# Altium PCB LPF-SWR.PcbDoc
Units mm, origin at the board's own origin, x right, y up, seen from the top; angles counter-clockwise.
Board outline 100 x 100 mm, 2 copper layers (Top Layer, Bottom Layer); 107 components, 77 nets, 382 pads, 0 vias.
Unrouted connection lines stored in the file: 303.
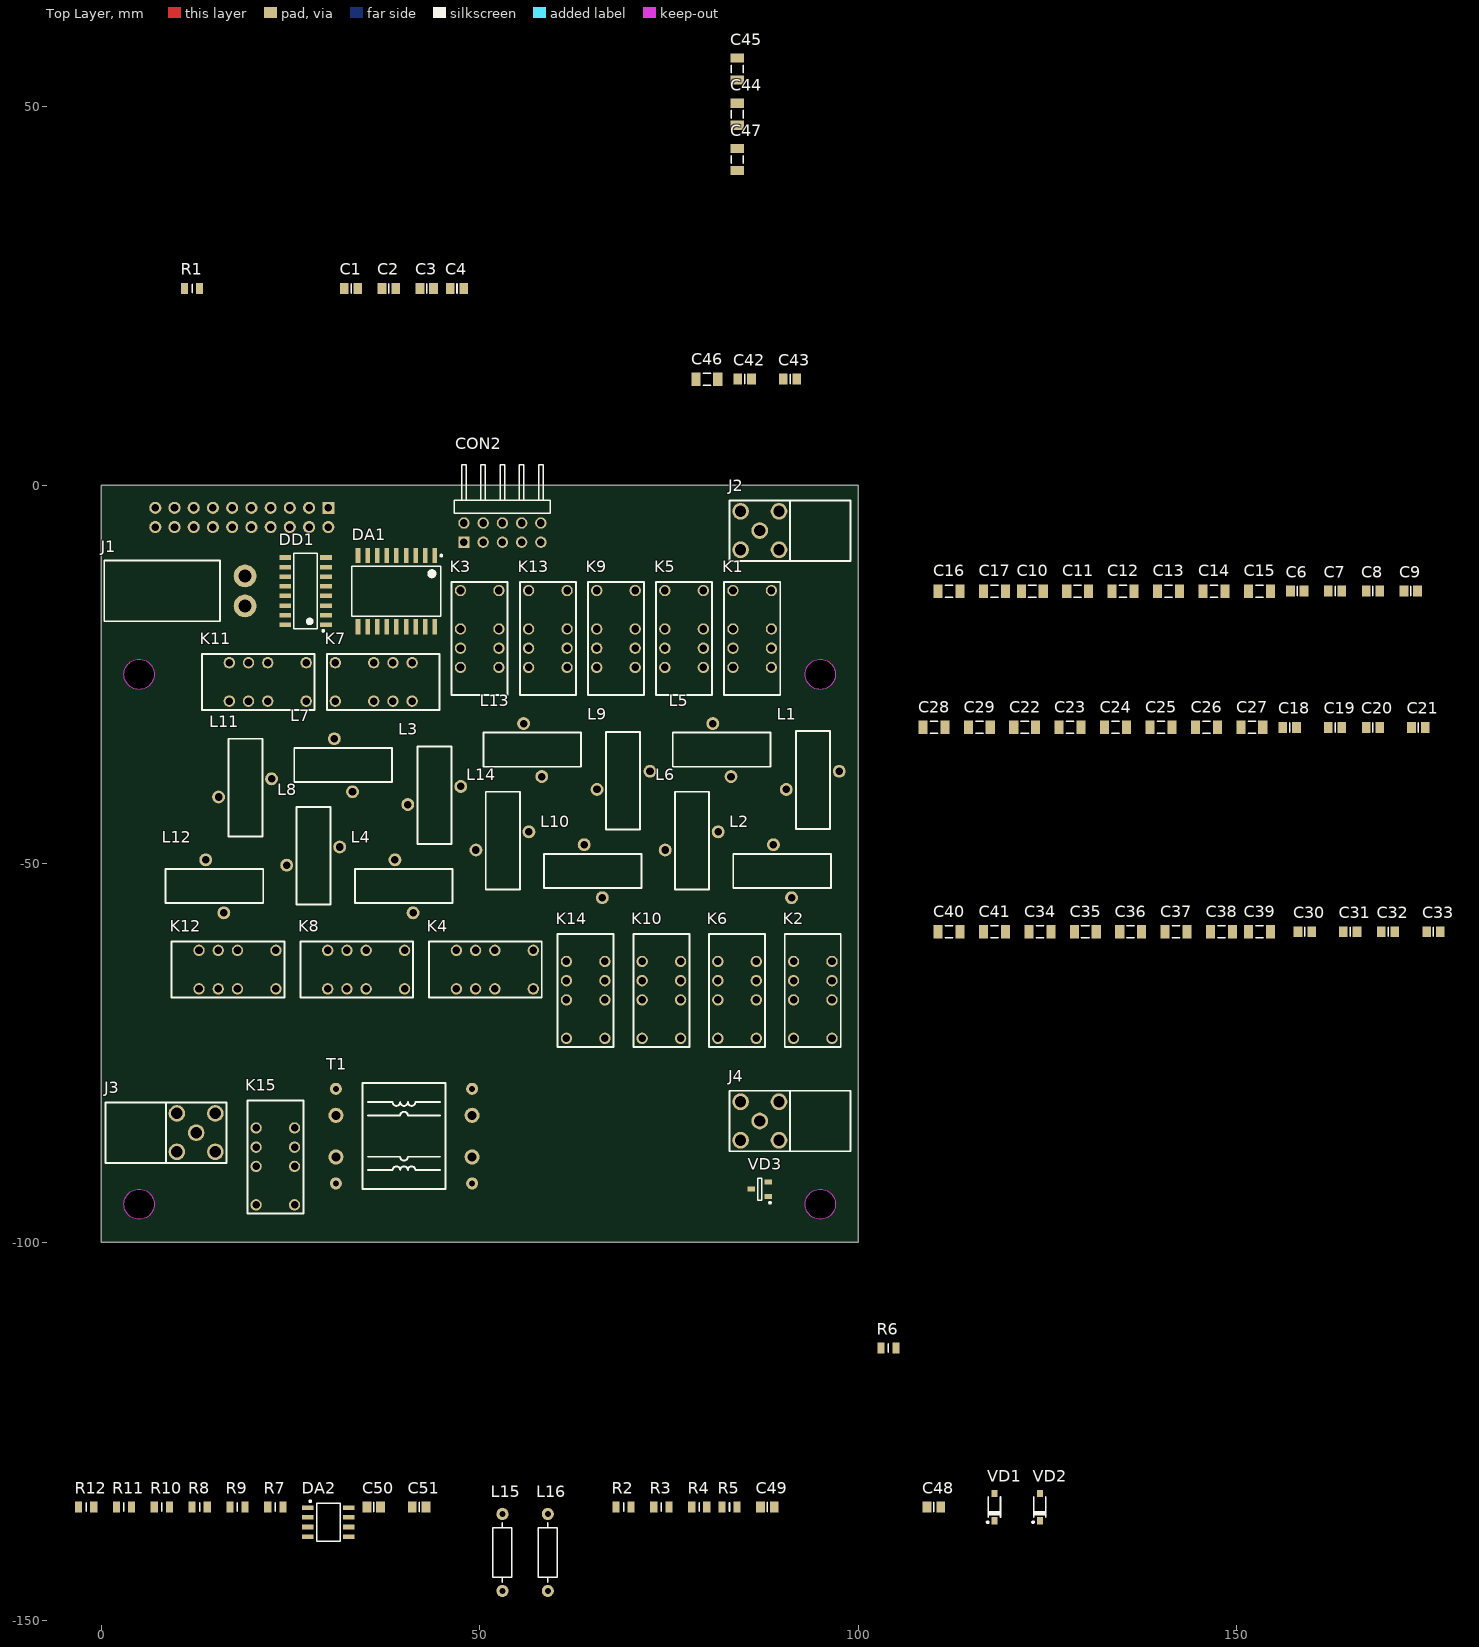
[diagram p0: Top Layer view]
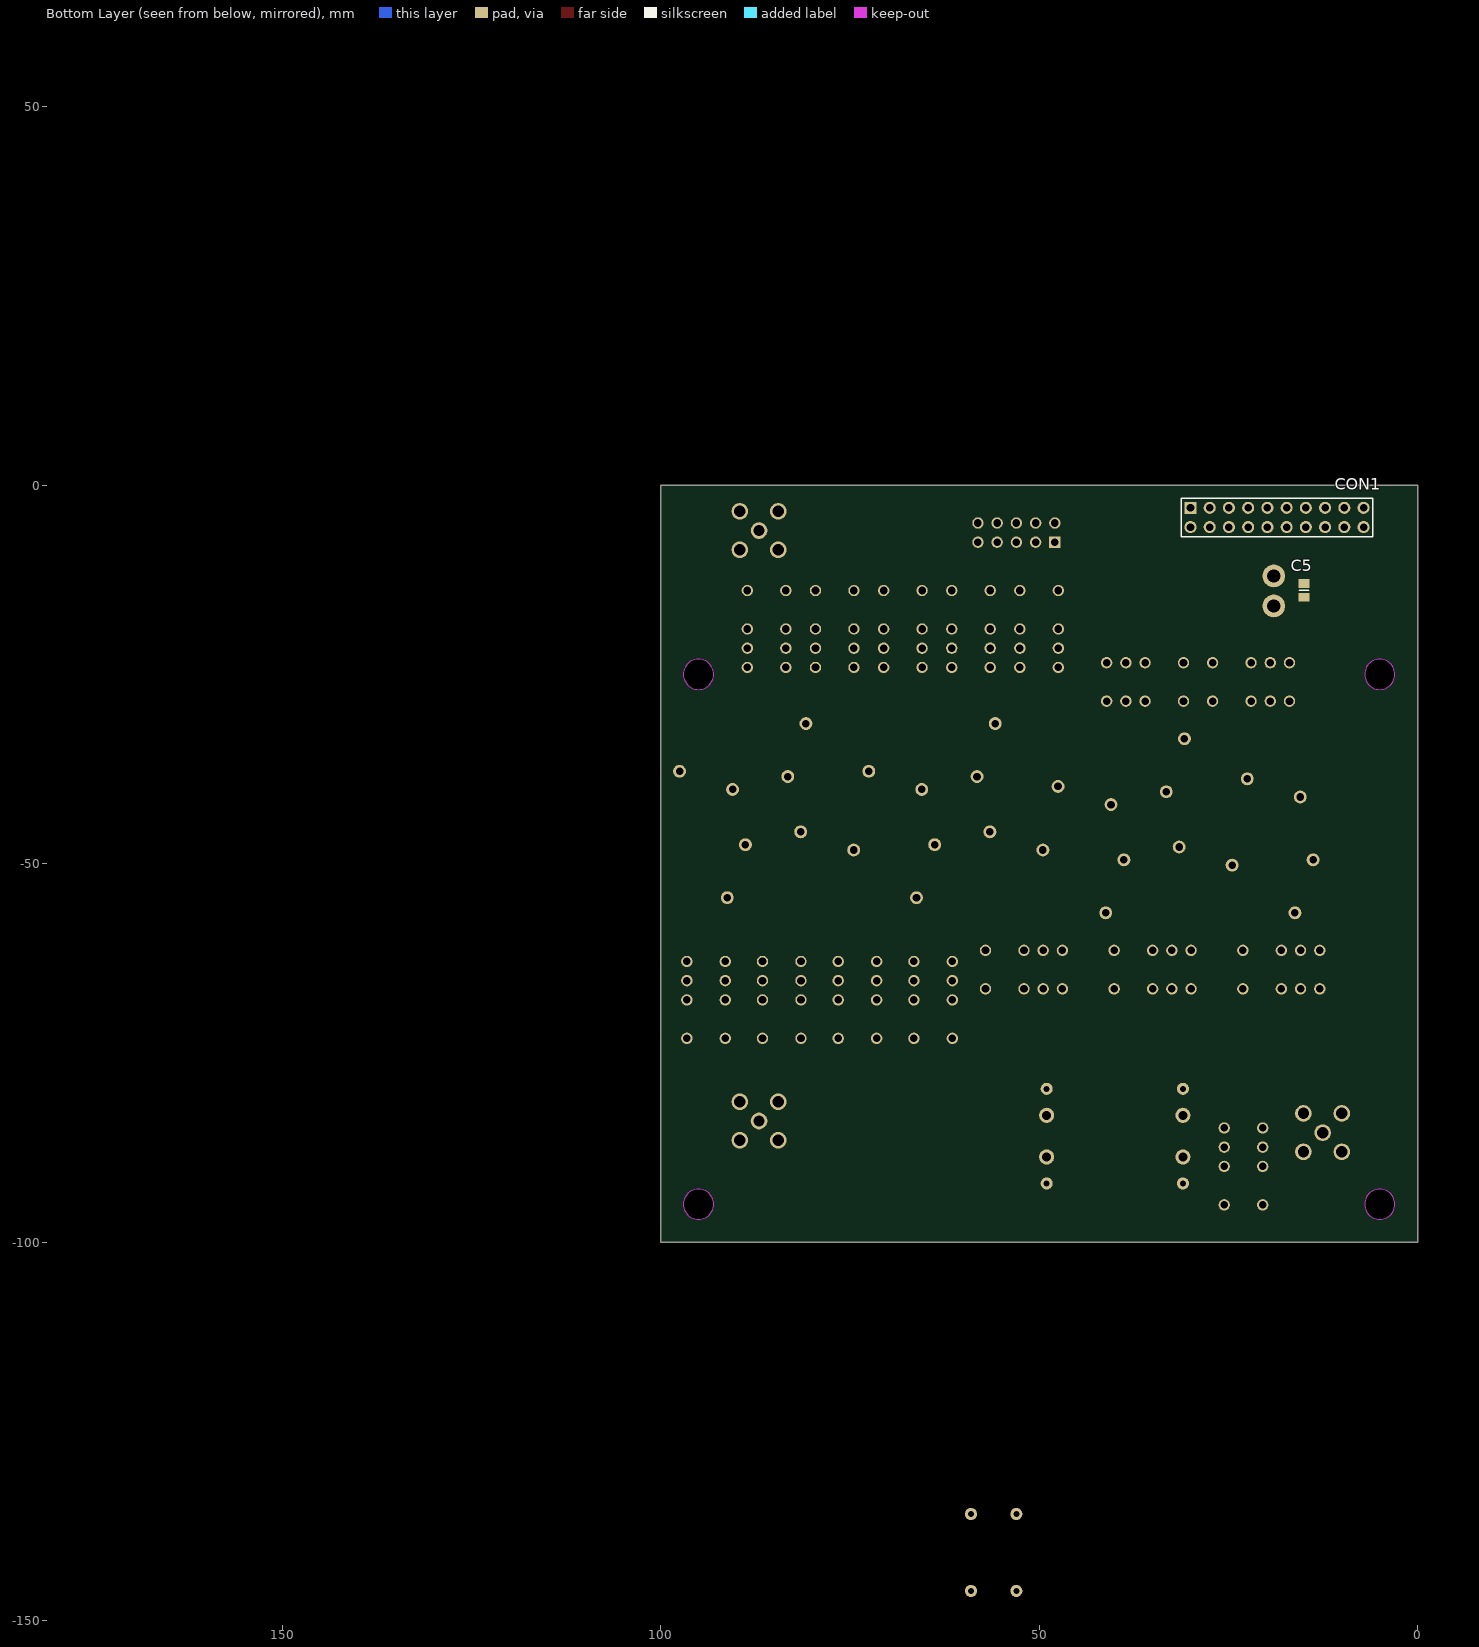
[diagram p1: Bottom Layer view, seen from below]

## Layer stack, top to bottom
Top Solder: solder mask 0.0102, Solder Resist, Dk 3.5
Top Layer: signal copper 0.0356
Dielectric 1: dielectric 0.32, FR-4, Dk 4.8
Bottom Layer: signal copper 0.0356
Bottom Solder: solder mask 0.0102, Solder Resist, Dk 3.5

## Board outline
0,0 0,-100 100,-100 100,0
cut-out: 5,-97 cw(c5,-95) 3,-95 cw(c5,-95) 5,-93 cw(c5,-95) 7,-95 cw(c5,-95)
cut-out: 5,-27 cw(c5,-25) 3,-25 cw(c5,-25) 5,-23 cw(c5,-25) 7,-25 cw(c5,-25)
cut-out: 95,-27 cw(c95,-25) 93,-25 cw(c95,-25) 95,-23 cw(c95,-25) 97,-25 cw(c95,-25)
cut-out: 95,-97 cw(c95,-95) 93,-95 cw(c95,-95) 95,-93 cw(c95,-95) 97,-95 cw(c95,-95)

## Design rules (kind name [scope] priority, off if disabled: settings)
Clearance [All] p1: gap=0.254 ignorepadtopadclearanceinfootprint=FALSE except(0: Arc-Hole Track-Hole SMDPad-Hole THPad-Hole Via-Hole Fill-Hole Poly-Hole Region-Hole Text-Hole)
PolygonConnect [All] p1: connectstyle=Relief reliefconductorwidth=0.254 reliefentries=4 polygonreliefangle="90 Angle" airgapwidth=0.254
RoutingVias [All] p1: holewidth=0.711 width=1.27 viastyle="Through Hole" minholewidth=0.711 minwidth=1.27 maxholewidth=0.711 maxwidth=1.27
SolderMaskExpansion [All] p1: expansion=0.102 istentingtop=FALSE
Width [All] p1: maxlimit=0.254 minlimit=0.254 preferedwidth=0.254
30 further rules are at their usual default settings.

## Classes and differential pairs
net class HF_LPF[0..6]: HF_LPF0 HF_LPF1 HF_LPF2 HF_LPF3 HF_LPF4 HF_LPF5 HF_LPF6
component class swr-antenna: C48 C49 C50 C51 DA2 J3 J4 K15 L15 L16 R2 R3 R4 R5 R6 R7 R8 R9 R10 R11 R12 T1 VD1 VD2 VD3
component class LPF: C6 C7 C8 C9 C10 C11 C12 C13 C14 C15 C16 C17 C18 C19 C20 C21 C22 C23 C24 C25 C26 C27 C28 C29 C30 C31 C32 C33 C34 C35 C36 C37 C38 C39 C40 C41 C42 C43 C44 C45 C46 C47 J2 K1 K2 K3 K4 K5 K6 K7 K8 K9 K10 K11 K12 K13 K14 L1 L2 L3 L4 L5 L6 L7 L8 L9 L10 L11 L12 L13 L14
component class control-interface: C1 C2 C3 C4 C5 CON1 CON2 DA1 DD1 J1 R1

## Components (designator, comment, footprint, x,y, rotation, side; value= is the part's Value field where it differs from the comment)
C1 "2.2uF" CAPC2013X100N 33.001,26 r0 top
C2 "0.1uF" CAPC2013X100N 38.001,26 r0 top
C3 "0.1uF" CAPC2013X100N 43.001,26 r0 top
C4 "2.2uF" CAPC2013X100N 47.001,26 r0 top
C5 "10uF" CAPC2013X100N 15,-13.9 r90 bottom
C6 "0.1uF" CAPC2013X100N 158.001,-14 r0 top
C7 "0.1uF" CAPC2013X100N 163.001,-14 r0 top
C8 "0.1uF" CAPC2013X100N 168.001,-14 r0 top
C9 "0.1uF" CAPC2013X100N 173.001,-14 r0 top
C10 "1271" CAPC3216X125N 123.001,-14 r0 top
C11 "1100" CAPC3216X125N 129.001,-14 r0 top
C12 "1228" CAPC3216X125N 135.001,-14 r0 top
C13 "171.8" CAPC3216X125N 141.001,-14 r0 top
C14 "220" CAPC3216X125N 147.001,-14 r0 top
C15 "94.6" CAPC3216X125N 153.001,-14 r0 top
C16 "1271" CAPC3216X125N 112.001,-14 r0 top
C17 "171.8" CAPC3216X125N 118.001,-14 r0 top
C18 "0.1uF" CAPC2013X100N 157.001,-32 r0 top
C19 "0.1uF" CAPC2013X100N 163.001,-32 r0 top
C20 "0.1uF" CAPC2013X100N 168.001,-32 r0 top
C21 "0.1uF" CAPC2013X100N 174.001,-32 r0 top
C22 "756.7" CAPC3216X125N 122.001,-32 r0 top
C23 "1000" CAPC3216X125N 128.001,-32 r0 top
C24 "386" CAPC3216X125N 134.001,-32 r0 top
C25 "106" CAPC3216X125N 140.001,-32 r0 top
C26 "180" CAPC3216X125N 146.001,-32 r0 top
C27 "8.5" CAPC3216X125N 152.001,-32 r0 top
C28 "756.7" CAPC3216X125N 110.001,-32 r0 top
C29 "106" CAPC3216X125N 116.001,-32 r0 top
C30 "0.1uF" CAPC2013X100N 159.001,-59 r0 top
C31 "0.1uF" CAPC2013X100N 165.001,-59 r0 top
C32 "0.1uF" CAPC2013X100N 170.001,-59 r0 top
C33 "0.1uF" CAPC2013X100N 176.001,-59 r0 top
C34 "464.8" CAPC3216X125N 124.001,-59 r0 top
C35 "470" CAPC3216X125N 130.001,-59 r0 top
C36 "356.4" CAPC3216X125N 136.001,-59 r0 top
C37 "61.69" CAPC3216X125N 142.001,-59 r0 top
C38 "100" CAPC3216X125N 148.001,-59 r0 top
C39 "9.7" CAPC3216X125N 153.001,-59 r0 top
C40 "464.8" CAPC3216X125N 112.001,-59 r0 top
C41 "61.69" CAPC3216X125N 118.001,-59 r0 top
C42 "0.1uF" CAPC2013X100N 85.001,14 r0 top
C43 "0.1uF" CAPC2013X100N 91.001,14 r0 top
C44 "288.9" CAPC3216X125N 84,49.001 r90 top
C45 "330" CAPC3216X125N 84,55.001 r90 top
C46 "199.1" CAPC3216X125N 80.001,14 r0 top
C47 "288.9" CAPC3216X125N 84,43.001 r90 top
C48 "0.1uF" CAPC2013X100N 110.001,-134.999 r0 top
C49 "10uF" CAPC2013X100N 88.001,-134.999 r0 top
C50 "0.1uF" CAPC2013X100N 36.001,-134.999 r0 top
C51 "0.1uF" CAPC2013X100N 42.001,-134.999 r0 top
CON1 "PBD-20" PBD-20 18.57,-4.27 r180 bottom locked
CON2 "PLD-10" PLD-10R 53,-6.27 r0 top
DA1 "ULN2803C" SOIC127P1030X265-18N 39,-14 r270 top
DA2 "LM358" SOIC127P600X175-8N 30.001,-136.999 r0 top
DD1 "74HCT595D" SOIC127P600X175-16N 27,-14 r180 top
J1 "PWL-2" PWL-2R 19,-13.98 r90 top
J2 "SMA" SMA002 87,-6 r270 top
J3 "SMA" SMA002 12.54,-85.54 r90 top
J4 "SMA" SMA002 87,-84 r270 top
K1 "G6S-2-12VDC" G6S-2 86,-19 r0 top
K2 "G6S-2-12VDC" G6S-2 94,-68 r180 top
K3 "G6S-2-12VDC" G6S-2 50,-19 r0 top
K4 "G6S-2-12VDC" G6S-2 52,-64 r270 top
K5 "G6S-2-12VDC" G6S-2 77,-19 r0 top
K6 "G6S-2-12VDC" G6S-2 84,-68 r180 top
K7 "G6S-2-12VDC" G6S-2 36,-26 r90 top
K8 "G6S-2-12VDC" G6S-2 35,-64 r270 top
K9 "G6S-2-12VDC" G6S-2 68,-19 r0 top
K10 "G6S-2-12VDC" G6S-2 74,-68 r180 top
K11 "G6S-2-12VDC" G6S-2 22,-26 r270 top
K12 "G6S-2-12VDC" G6S-2 18,-64 r270 top
K13 "G6S-2-12VDC" G6S-2 59,-19 r0 top
K14 "G6S-2-12VDC" G6S-2 64,-68 r180 top
K15 "G6S-2-12VDC" G6S-2 23,-90 r180 top
L1 "4.375u" T50-2 94,-39 r270 top
L2 "4.375u" T50-2 90,-51 r0 top
L3 "591.3nH" T50-6 44,-41 r270 top
L4 "591.3nH" T50-6 40,-53 r0 top
L5 "2.604uH" T50-2 82,-35 r0 top
L6 "2.604uH" T50-2 78,-47 r270 top
L7 "342.2nH" T50-6 32,-37 r0 top
L8 "342.2nH" T50-6 28,-49 r270 top
L9 "1.5uH" T50-6 69,-39 r90 top
L10 "1.5uH" T50-6 65,-51 r0 top
L11 "199.1nH" T50-6 19,-40 r270 top
L12 "199.1nH" T50-6 15,-53 r0 top
L13 "994.9nH" T50-6 57,-35 r0 top
L14 "994.9nH" T50-6 53,-47 r270 top
L15 "100uH" RES1016-650X250 53.001,-140.999 r90 top
L16 "100uH" RES1016-650X250 59.001,-140.999 r90 top
R1 "10k" RESC2013X64N 12.001,26 r0 top
R2 "2.2k" RESC2013X64N 69.001,-134.999 r0 top
R3 "50" RESC2013X64N 74.001,-134.999 r0 top
R4 "50" RESC2013X64N 79.001,-134.999 r0 top
R5 "2.2k" RESC2013X64N 83.001,-134.999 r0 top
R6 "100" RESC2013X64N 104.001,-114 r0 top
R7 "100" RESC2013X64N 23.001,-134.999 r0 top
R8 "22k" RESC2013X64N 13.001,-134.999 r0 top
R9 "22k" RESC2013X64N 18.001,-134.999 r0 top
R10 "*" RESC2013X64N 8.001,-134.999 r0 top
R11 "100" RESC2013X64N 3.001,-134.999 r0 top
R12 "*" RESC2013X64N -1.999,-134.999 r0 top
T1 "BN43-302" TANDEM 40,-86 r180 top
VD1 "BAT46ZFILM" SOD3816X118N 118.001,-134.999 r90 top
VD2 "BAT46ZFILM" SOD3816X118N 124.001,-134.999 r90 top
VD3 "BAT54SL" SOT95P229X119-3N 87,-93 r180 top

## Footprints (in the part's own frame and the unit in brackets; to place one, negate y for a bottom-side part, rotate by r counter-clockwise, add the part's x,y. Pads: shape width x height; smd on the part's side, far side on the other; paste and mask are expansions set on the pad)
CAPC2013X100N [mm] "Capacitor, Non-Polarized, Chip; 2.00mm L X 1.25mm W X 0.9mm H, IPC Medium Density"
  rect 1.15x1.45 smd: 1(-0.9,0) 2(0.9,0)
  silkscreen extent 0,-0.63 0,0.63, body extent -1.1,-0.72 1.1,0.73, height 1
CAPC3216X125N [mm] "Capacitor, Non-Polarized, Chip; 3.20mm L X 1.60mm W X 1.25mm H, IPC Medium Density"
  rect 1.2x1.8 smd: 1(-1.45,0) 2(1.45,0)
  silkscreen extent -0.5,-0.8 0.5,0.8, body extent -1.7,-0.9 1.7,0.9, height 1.25
G6S-2 [mm] "Compact, Industry-Standard 2-pole relay,  designed to switch 2A Signal Loads"
  round 1.5 hole 1: 1(-2.54,5.08) 3(-2.54,0) 4(-2.54,-2.54) 5(-2.54,-5.08) 8(2.54,-5.08) 9(2.54,-2.54) 10(2.54,0) 12(2.54,5.08)
  silkscreen extent -3.7,-8.7 3.7,6.2, body extent -3.65,-8.65 3.65,6.15, height 9.2
PBD-20 [mm] "20 Contacts - Pitch 2.54mm - Top Entry, Dual Row Through Mount Receptacle"
  rect 1.6x1.6 hole 1: 1(-11.43,1.27)
  round 1.6 hole 1: 2(-11.43,-1.27) 3(-8.89,1.27) 4(-8.89,-1.27) 5(-6.35,1.27) 6(-6.35,-1.27) 7(-3.81,1.27) 8(-3.81,-1.27) 9(-1.27,1.27) 10(-1.27,-1.27) 11(1.27,1.27) 12(1.27,-1.27) 13(3.81,1.27) 14(3.81,-1.27) 15(6.35,1.27) 16(6.35,-1.27) 17(8.89,1.27) 18(8.89,-1.27) 19(11.43,1.27) 20(11.43,-1.27)
  silkscreen extent -12.66,-2.54 12.66,2.54, body extent -12.7,-2.54 12.7,2.54, height 8.5
PLD-10R [mm] "10 Contacts - Pitch 2.54mm - Dual Row Right Angle Strip Header - Insulator 1.7mm"
  rect 1.5x1.5 hole 1: 1(-5.08,-1.27)
  round 1.5 hole 1: 2(-5.08,1.27) 3(-2.54,-1.27) 4(-2.54,1.27) 5(0,-1.27) 6(0,1.27) 7(2.54,-1.27) 8(2.54,1.27) 9(5.08,-1.27) 10(5.08,1.27)
  silkscreen extent -6.35,2.57 6.35,8.97, body extent -6.35,-1.57 6.35,10.27, height 5.57
PWL-2R [mm] "PCB Connector; Rated Voltage: 50/250V AC.DC; Rated Current: 5A"
  round 3 hole 1.75: 1(-1.98,0) 2(1.98,0)
  silkscreen extent -4,3.3 4,18.6, body extent -3.96,-0.6 3.96,18.97, height 9.6
RES1016-650X250 [mm] "Resistor, Axial, Pad spacing 10.16 mm - Body Lengh 6.5mm X Body Diameter 2.5mm"
  round 1.6 hole 0.8: 1(-5.08,0) 2(5.08,0)
  silkscreen extent -3.95,-1.25 3.95,1.25, body extent -5.38,-1.27 5.38,1.26, height 2.51
RESC2013X64N [mm] "Chip Resistor, EIA 0805, Metric 2013, Body 2.03x1.27mm, IPC Medium Density"
  rect 0.95x1.45 smd: 1(-1,0) 2(1,0)
  silkscreen extent 0,-0.55 0,0.55, body extent -1.02,-0.63 1.02,0.64, height 0.64
SMA002 [mm] "SMA Connector Series"
  round 2.2 hole 1.5: 1(0,0) 2(-2.54,2.54) 2(-2.54,-2.54) 2(2.54,2.54) 2(2.54,-2.54)
  silkscreen extent -4,-4 4,12, body extent -3.18,-3.18 3.18,11.63, height 9.97
SOD3816X118N [mm] "SOD Diode (SOD-123); 2.70mm W X 1.60mm L X 1.18mm H body, IPC Medium Density"
  rect 0.95x0.8 smd: 1(-1.8,0) 2(1.8,0)
  silkscreen extent -2.12,-0.8 1.35,1.02, body extent -1.95,-0.9 1.95,0.9, height 1.18
SOIC127P600X175-8N [mm] "SOIC 8, Pitch 1.27mm - Body 4x5mm, IPC Medium Density"
  rect 1.55x0.6 smd: 1(-2.7,1.905) 2(-2.7,0.635) 3(-2.7,-0.635) 4(-2.7,-1.905) 5(2.7,-1.905) 6(2.7,-0.635) 7(2.7,0.635) 8(2.7,1.905)
  silkscreen extent -2.52,-2.5 1.55,2.88, body extent -3.1,-2.5 3.1,2.5, height 1.75
SOIC127P600X175-16N [mm] "SOIC 16, Pitch 1.27mm - Body 4x10mm, IPC Medium Density"
  rect 1.55x0.6 smd: 1(-2.7,4.445) 2(-2.7,3.175) 3(-2.7,1.905) 4(-2.7,0.635) 5(-2.7,-0.635) 6(-2.7,-1.905) 7(-2.7,-3.175) 8(-2.7,-4.445) 9(2.7,-4.445) 10(2.7,-3.175) 11(2.7,-1.905) 12(2.7,-0.635) 13(2.7,0.635) 14(2.7,1.905) 15(2.7,3.175) 16(2.7,4.445)
  silkscreen extent -2.45,-5 1.55,5.37, body extent -3.1,-5 3.1,5, height 1.75
SOIC127P1030X265-18N [mm] "SOIC, 18-Leads, Body 13.9x7.6mm (max), Pitch 1.27mm, IPC Medium Density"
  rect 2x0.6 smd: 1(-4.7,5.08) 2(-4.7,3.81) 3(-4.7,2.54) 4(-4.7,1.27) 5(-4.7,0) 6(-4.7,-1.27) 7(-4.7,-2.54) 8(-4.7,-3.81) 9(-4.7,-5.08) 10(4.7,-5.08) 11(4.7,-3.81) 12(4.7,-2.54) 13(4.7,-1.27) 14(4.7,0) 15(4.7,1.27) 16(4.7,2.54) 17(4.7,3.81) 18(4.7,5.08)
  silkscreen extent -4.82,-5.87 3.3,6.06, body extent -5.18,-5.87 5.18,5.88, height 1.68
SOT95P229X119-3N [mm] "SOT23 3-Leads, 0.95mm pitch; 3 pin, 1.296mm W X 2.858mm L X 1.194mm H body, IPC Medium Density"
  rect 1x0.65 smd: 1(-1.1,0.95) 2(-1.1,-0.95) 3(1.1,0)
  silkscreen extent -1.48,-1.45 0.28,1.92, body extent -1.25,-1.5 1.25,1.5, height 1.19
T50-2 [mm]
  round 1.7 hole 1: 1(-1.2,3.5) 2(1.2,-3.5)
  silkscreen extent -6.5,-2.2 6.4,2.3, body extent -6.5,-2.3 6.5,2.3, height 13.08
T50-6 [mm]
  round 1.7 hole 1: 1(-1.2,3.5) 2(1.2,-3.5)
  silkscreen extent -6.5,-2.2 6.4,2.3, body extent -6.5,-2.3 6.5,2.3, height 13.08
TANDEM [mm]
  round 2 hole 1.2: 1(-9,2.75) 2(9,2.75) 7(-9,-2.75) 8(9,-2.75)
  round 1.6 hole 0.8: 3(-9,6.25) 4(9,6.25) 5(-9,-6.25) 6(9,-6.25)
  silkscreen extent -5.5,-7 5.5,7, body extent -5.12,-6.62 5.13,6.58, height 7.55

## Part data
C1 C2 C3 C4 C5 C6 C7 C8 C9 C18 C19 C20 C21 C30 C31 C32 C33 C42 C43 C48 C49 C50 C51: library part Cap0805, "Capacitor 2x1.25 mm"
C10 C11 C12 C13 C14 C15 C16 C17 C22 C23 C24 C25 C26 C27 C28 C29 C34 C35 C36 C37 C38 C39 C40 C41 C44 C45 C46 C47: library part Cap1206, "Capacitor 3.2x1.6 mm"
CON1: library part CONNECTOR-20
CON2: library part CONNECTOR-10
DA1: library part ULN2803A, "Darlington Transistor Array"
DA2: "Single Supply Dual / Operational Amplifiers"
DD1: "8-bit serial-in, serial or parallel-out shift register with output / latches; 3-state"
J1: library part PWR_CONNECTOR
J2 J4: library part "RF Connector"
J3: library part "RF Connector", "EM-BC028M-NGP-50"
K1 K2 K3 K4 K5 K6 K7 K8 K9 K10 K11 K12 K13 K14 K15: "Compact, Industry-Standard 2-pole relay"
L1 L2 L5 L6: library part Inductor, "T50-2"
L3 L4 L7 L8 L9 L10 L11 L12 L13 L14: library part Inductor, "T50-6"
L15 L16: library part Inductor, "DLA100-MN Ferrocore"
R1 R2 R3 R4 R5 R6 R7 R8 R9 R10 R11 R12: library part Res0805
T1: library part "tandem match"
VD1 VD2: library part DIODE, "Small signal Schottky diodes"
VD3: library part DIODE-2-1A-3C-3A-2C

## Nets (pads, with @x,y where several pads share a name; then routed paths per layer and width w, separated by ;. In a path a pad name is that pad's centre, name@x,y a point inside that pad or via, vN(x,y) a via of type N, cw(c..) or ccw(c..) an arc to the next point about the centre after c; other vN are vias at no path point)
GND: C1.1 C2.1 C3.1 C4.1 C5.2 C10.1 C11.1 C12.1 C13.1 C14.1 C15.1 C16.1 C17.1 C22.1 C23.1 C24.1 C25.1 C26.1 C27.1 C28.1 C29.1 C34.1 C35.1 C36.1 C37.1 C38.1 C39.1 C40.1 C41.1 C44.1 C45.1 C46.1 C47.1 C49.1 C50.2 C51.1 CON1.1 CON1.3 CON1.5 CON1.7 CON1.9 CON1.11 CON1.13 CON1.15 CON2.5 CON2.7 DA1.9 DA2.4 DD1.8 DD1.13 J1.2 J2.2 J3.2 J4.2 R3.1 R4.1 R8.1 R9.2 R10.1 R12.1 T1.3 T1.5 VD3.1 VD3.2
HF_LPF0: C6.1 C7.1 DA1.18 K1.12 K2.12
HF_LPF1: C18.1 C19.1 DA1.17 K5.12 K6.12
HF_LPF2: C30.1 C31.1 DA1.16 K9.12 K10.12
HF_LPF3: C42.1 C43.1 DA1.15 K13.12 K14.12
HF_LPF4: C8.1 C9.1 DA1.14 K3.12 K4.12
HF_LPF5: C20.1 C21.1 DA1.13 K7.12 K8.12
HF_LPF6: C32.1 C33.1 DA1.12 K11.12 K12.12
HF_LPF_OUT: K2.4 K2.9 K4.4 K4.9 K6.4 K6.9 K8.4 K8.9 K10.4 K10.9 K12.4 K12.9 K14.4 K14.9 T1.1
HF_PA_OUT: J2.1 K1.4 K1.9 K3.4 K3.9 K5.4 K5.9 K7.4 K7.9 K9.4 K9.9 K11.4 K11.9 K13.4 K13.9
HF_TX/RX: C48.1 DA1.11 K15.12
HF_TX_ENA: CON1.10 CON2.8 DA1.8
NetC10_2: C10.2 K1.5 K1.8 L1.1
NetC11_2: C11.2 C12.2 L1.2 L2.1
NetC13_2: C13.2 K3.5 K3.8 L3.1
NetC14_2: C14.2 C15.2 L3.2 L4.1
NetC16_2: C16.2 K2.5 K2.8 L2.2
NetC17_2: C17.2 K4.5 K4.8 L4.2
NetC22_2: C22.2 K5.5 K5.8 L5.1
NetC23_2: C23.2 C24.2 L5.2 L6.1
NetC25_2: C25.2 K7.5 K7.8 L7.1
NetC26_2: C26.2 C27.2 L7.2 L8.1
NetC28_2: C28.2 K6.5 K6.8 L6.2
NetC29_2: C29.2 K8.5 K8.8 L8.2
NetC34_2: C34.2 K9.5 K9.8 L9.1
NetC35_2: C35.2 C36.2 L9.2 L10.1
NetC37_2: C37.2 K11.5 K11.8 L11.1
NetC38_2: C38.2 C39.2 L11.2 L12.1
NetC40_2: C40.2 K10.5 K10.8 L10.2
NetC41_2: C41.2 K12.5 K12.8 L12.2
NetC44_2: C44.2 K13.5 K13.8 L13.1
NetC45_2: C45.2 C46.2 L13.2 L14.1
NetC47_2: C47.2 K14.5 K14.8 L14.2
NetC49_2: C49.2 DA2.8 R6.2
NetC50_1: C50.1 DA2.3 L15.1 R8.2
NetC51_2: C51.2 DA2.5 L16.2 R9.1
NetCON1_12: CON1.12 R11.2 R12.2
NetCON1_14: CON1.14 R7.2 R10.2
NetDA2_1: DA2.1 DA2.2 R7.1
NetDA2_6: DA2.6 DA2.7 R11.1
NetJ3_1: J3.1 K15.4 K15.9
NetJ4_1: J4.1 K15.3 K15.10 VD3.3
NetK1_3: K1.3 K1.10
NetK2_3: K2.3 K2.10
NetK3_3: K3.3 K3.10
NetK4_3: K4.3 K4.10
NetK5_3: K5.3 K5.10
NetK6_3: K6.3 K6.10
NetK7_3: K7.3 K7.10
NetK8_3: K8.3 K8.10
NetK9_3: K9.3 K9.10
NetK10_3: K10.3 K10.10
NetK11_3: K11.3 K11.10
NetK12_3: K12.3 K12.10
NetK13_3: K13.3 K13.10
NetK14_3: K14.3 K14.10
NetK15_5: K15.5 K15.8 T1.2 T1.6
NetL15_2: L15.2 R2.1
NetL16_1: L16.1 R5.1
NetR2_2: R2.2 VD1.1
NetR3_2: R3.2 T1.7 VD1.2
NetR4_2: R4.2 T1.4 T1.8 VD2.2
NetR5_2: R5.2 VD2.1
Q1: DA1.1 DD1.1
Q2: DA1.2 DD1.2
Q3: DA1.3 DD1.3
Q4: DA1.4 DD1.4
Q5: DA1.5 DD1.5
Q6: DA1.6 DD1.6
Q7: DA1.7 DD1.7
RCK: CON1.4 CON2.2 DD1.12
SER_IN: CON1.2 CON2.1 DD1.14
SR_OUT: CON2.6 DD1.9
SRCK: CON1.6 CON2.3 DD1.11
SRCLR: CON1.8 CON2.4 DD1.10 R1.1
V5V0: C1.2 C2.2 C3.2 C4.2 CON1.17 CON1.18 CON1.19 CON1.20 CON2.9 CON2.10 DD1.16 R1.2
V12V0: C5.1 C6.2 C7.2 C8.2 C9.2 C18.2 C19.2 C20.2 C21.2 C30.2 C31.2 C32.2 C33.2 C42.2 C43.2 C48.2 DA1.10 J1.1 K1.1 K2.1 K3.1 K4.1 K5.1 K6.1 K7.1 K8.1 K9.1 K10.1 K11.1 K12.1 K13.1 K14.1 K15.1 R6.1
pads on no net: CON1.16 DD1.15